# Altium PCB C8T6_MINI.PcbDoc
Units mm, origin at the board's own origin, x right, y up, seen from the top; angles counter-clockwise.
Board outline 100 x 50 mm, 2 copper layers (Top Layer, Bottom Layer); 43 components, 48 nets, 197 pads, 38 vias.
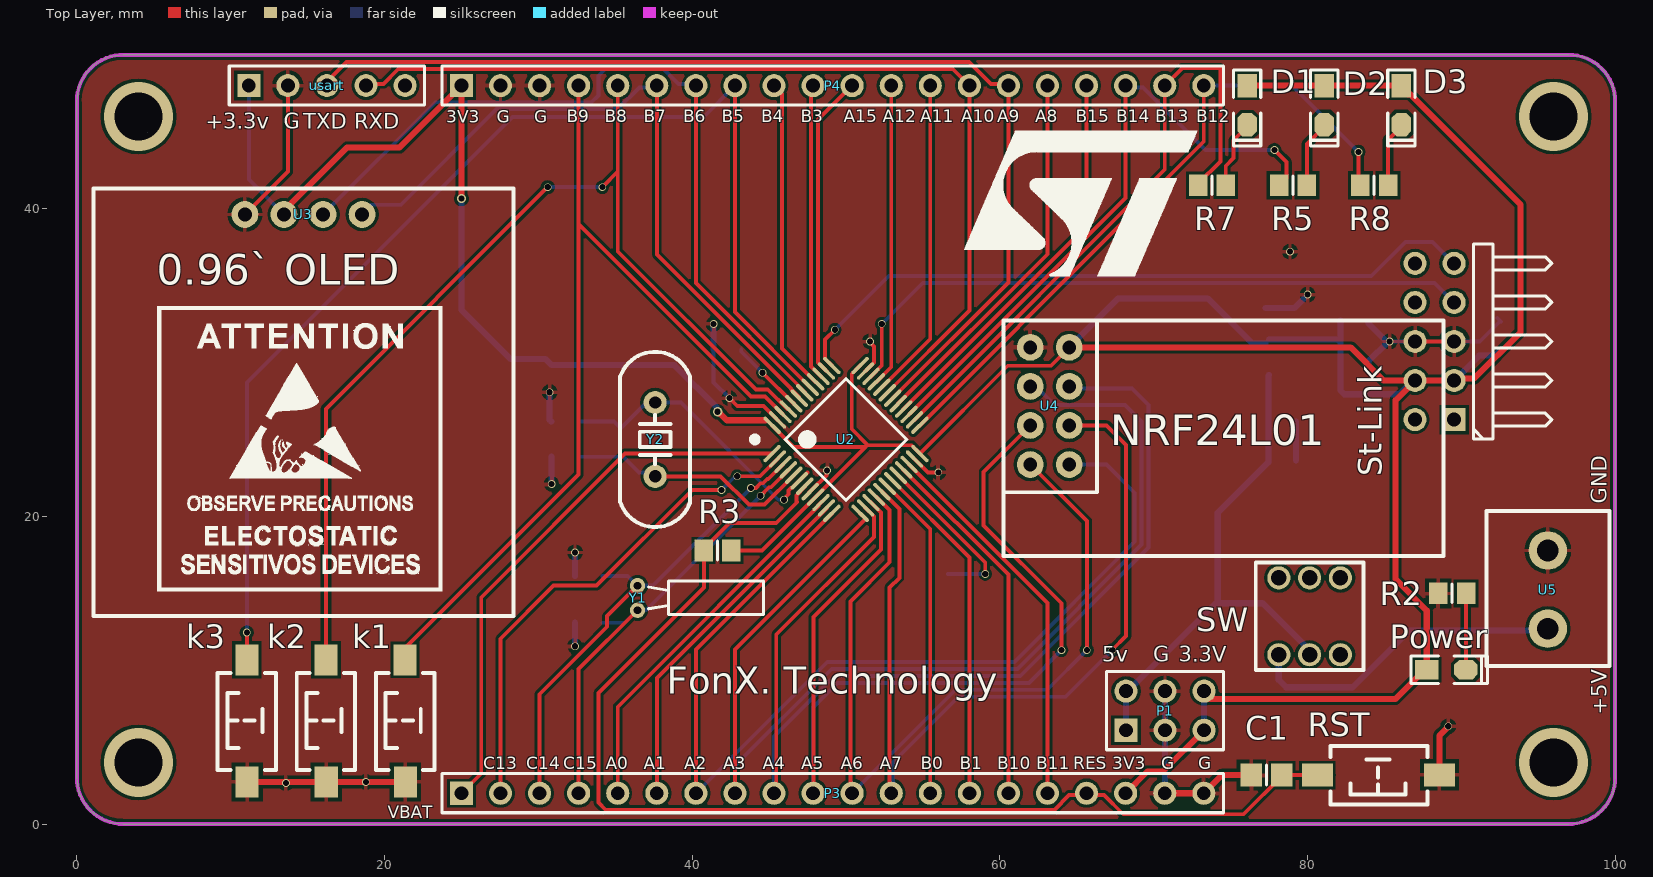
[diagram p0: Top Layer view]
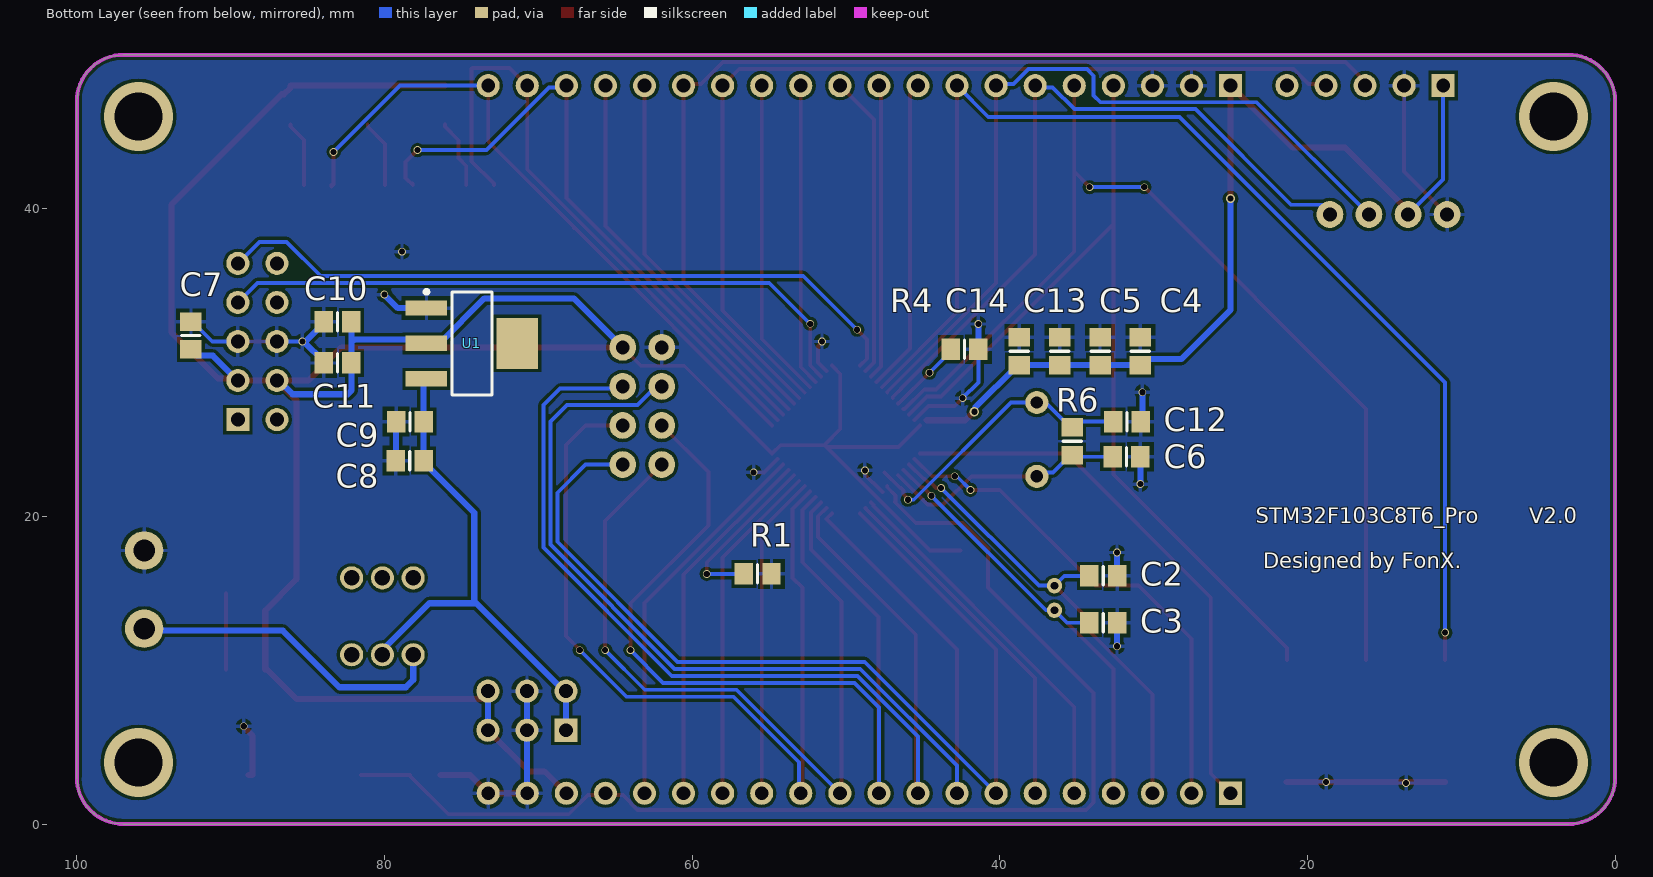
[diagram p1: Bottom Layer view, seen from below]

## Layer stack, top to bottom
Top Solder: solder mask 0.0102, Solder Resist, Dk 3.5
Top Layer: signal copper 0.0356
Dielectric 1: dielectric 0.32, FR-4, Dk 4.8
Bottom Layer: signal copper 0.0356
Bottom Solder: solder mask 0.0102, Solder Resist, Dk 3.5

## Board outline
3,0 cw(c3,3) 0,3 0,47 cw(c3,47) 3,50 97,50 cw(c97,47) 100,47 100,3 cw(c97,3) 97,0

## Design rules (kind name [scope] priority, off if disabled: settings)
Clearance Clearance_1 [All] p1: gap=0.2 ignorepadtopadclearanceinfootprint=FALSE
Clearance [All] p2: gap=0.254 ignorepadtopadclearanceinfootprint=FALSE except(0: Arc-Hole Track-Hole SMDPad-Hole THPad-Hole Via-Hole Fill-Hole Poly-Hole Region-Hole Text-Hole)
ComponentClearance [All] p1 off: gap=0.1 collisioncheckmode=3 verticalgap=0.1 showdistances=FALSE
Height [All] p1 off: minheight=0 maxheight=25.4 prefheight=12.7
HoleSize [All] p1: absolutevalues=TRUE maxlimit=3.2 minlimit=0.025 maxpercent=80.000 minpercent=20.000
HoleToHoleClearance [All] p1: gap=0.2 allowstackedmicrovias=TRUE
MinimumSolderMaskSliver [All] p1: minsoldermaskwidth=0.2
PolygonConnect [All] p1: connectstyle=Relief reliefconductorwidth=0.254 reliefentries=4 polygonreliefangle="90 Angle" airgapwidth=0.254
RoutingCorners RoutingCorners_1 [All] p1: cornerstyle=45-Degree minsetback=2.54 maxsetback=2.54
RoutingCorners [All] p2: cornerstyle=45-Degree minsetback=2.54 maxsetback=2.54
RoutingVias [All] p1: holewidth=0.711 width=1.27 viastyle="Through Hole" minholewidth=0.711 minwidth=1.27 maxholewidth=0.711 maxwidth=1.27
SilkToSilkClearance [All] p1: silktosilkclearance=0.1
SilkToSolderMaskClearance [IsPad] p1: minsilkscreentomaskgap=0.1 clearancetoexposedcopper=TRUE
SolderMaskExpansion [All] p1: expansion=0.102
Width input [InNet('INPUT')] p1: maxlimit=0.4 minlimit=0.4 preferedwidth=0.4
Width GND [InNet('GND')] p2: maxlimit=0.4 minlimit=0.254 preferedwidth=0.254
Width vcc5 [InNet('5V')] p3: maxlimit=0.4 minlimit=0.4 preferedwidth=0.4
Width vcc3.3 [InNet('VCC3V3')] p4: maxlimit=0.4 minlimit=0.254 preferedwidth=0.254
Width [All] p5: maxlimit=0.254 minlimit=0.254 preferedwidth=0.254
22 further rules are at their usual default settings.

## Components (designator, comment, footprint, x,y, rotation, side; value= is the part's Value field where it differs from the comment)
C1 "105,0805" 6-0805_M 77.343,3.175 r0 top value=104
C2 "12P,0805" 6-0805_N 33.274,16.129 r180 bottom value=104
C3 "12P,0805" 6-0805_N 33.274,13.081 r180 bottom value=104
C4 "105,0805" 6-0805_N 30.861,30.734 r270 bottom value=104
C5 "105,0805" 6-0805_N 33.486,30.734 r270 bottom value=104
C6 "22P,0805" 6-0805_N 31.761,23.876 r180 bottom value=104
C7 "104,0805" 6-0805_N 92.583,31.75 r90 bottom value=104
C8 "104,0805" 6-0805_N 78.359,23.622 r0 bottom value=104
C9 "106,0805" 6-0805_N 78.348,26.162 r0 bottom value=104
C10 "106,0805" 6-0805_N 83.058,32.639 r180 bottom value=104
C11 "104,0805" 6-0805_N 83.058,29.972 r180 bottom value=104
C12 "22P,0805" 6-0805_N 31.739,26.162 r180 bottom value=104
C13 "105,0805" 6-0805_N 36.11,30.734 r270 bottom value=104
C14 "105,0805" 6-0805_N 38.735,30.734 r270 bottom value=104
D1 "LED" "LED 0805G" 76.073,46.736 r270 top
D2 "LED" "LED 0805G" 81.09,46.736 r270 top
D3 "LED" "LED 0805G" 86.106,46.736 r270 top
k1 "SW-PB_V" "TSW SMD-3*6*2.5" 21.336,6.731 r90 top
k2 "SW-PB_V" "TSW SMD-3*6*2.5" 16.192,6.731 r90 top
k3 "SW-PB_V" "TSW SMD-3*6*2.5" 11.049,6.731 r90 top
P1 "Header 3X2A" HDR2X3_CEN 68.199,6.096 r0 top
P3 "Header 20" HDR1X20 25,2 r0 top
P4 "Header 20" HDR1X20 25,48 r0 top
Power "LED" "LED 0805G" 89.027,10.033 r0 top (schematic designator Power_LED)
R1 "10K,0805" 6-0805_N 55.742,16.256 r180 bottom
R2 "510R,0805" 6-0805_N 89.408,14.986 r180 top
R3 "10K,0805" 6-0805_N 41.645,17.78 r0 top
R4 "10K,0805" 6-0805_N 42.291,30.861 r180 bottom
R5 "510R,0805" 6-0805_N 79.063,41.529 r180 top
R6 "1M0805" 6-0805_N 35.306,24.881 r270 bottom
R7 "510R,0805" 6-0805_N 73.787,41.529 r180 top
R8 "510R,0805" 6-0805_N 84.339,41.529 r180 top
RST "SW-PB_V" "TSW SMD-3*6*2.5" 84.582,3.175 r180 top
St-Link "Header 5X2H" HDR2X5H 89.535,26.289 r90 top
SW "SW-DPDT" PCBComponent_1 78.137,11.002 r0 top
U1 "AMS1117" SOT223_M 74.324,31.242 r180 bottom
U2 "STM32F103C8T6" "TQFP48 7x7_L" 50,25 r315 top
U3 "OLED" OLED 1.082,13.524 r0 top
U4 "nrf24L01" NRF24L01 60.236,32.728 r270 top
U5 "POWER" power 95.631,12.7 r90 top
usart "Header 5" HDR1X5 11.176,48.006 r0 top
Y1 "32.768K" 圆柱晶振 36.449,14.694 r270 top
Y2 "8M" "XTAL-49S DIP" 37.592,25 r270 top

## Footprints (in the part's own frame and the unit in brackets; to place one, negate y for a bottom-side part, rotate by r counter-clockwise, add the part's x,y. Pads: shape width x height; smd on the part's side, far side on the other; paste and mask are expansions set on the pad)
6-0805_M [mm] "Chip Resistor, Body 2.0x1.2mm, IPC Low Density"
  rect 1.4x1.5 smd: 1(-1,0) 2(1,0)
  silkscreen extent 0,-0.65 0,0.65, body extent -1.07,-0.7 1.07,0.7, height 0.7
6-0805_N [mm] "Chip Resistor, Body 2.0x1.2mm, IPC Medium Density"
  rect 1.2x1.4 smd: 1(-0.9,0) 2(0.9,0)
  silkscreen extent 0,-0.6 0,0.6, body extent -1.07,-0.7 1.07,0.7, height 0.7
HDR1X5 [mm] "Connector; Header; 5 Position"
  rect 1.5x1.5 hole 0.9: 1(0,0)
  round 1.5 hole 0.9: 2(2.54,0) 3(5.08,0) 4(7.62,0) 5(10.16,0)
  silkscreen extent -1.27,-1.27 11.43,1.27
HDR1X20 [mm] "Connector; Header; 20 Position"
  rect 1.5x1.5 hole 0.9: 1(0,0)
  round 1.5 hole 0.9: 2(2.54,0) 3(5.08,0) 4(7.62,0) 5(10.16,0) 6(12.7,0) 7(15.24,0) 8(17.78,0) 9(20.32,0) 10(22.86,0) 11(25.4,0) 12(27.94,0) 13(30.48,0) 14(33.02,0) 15(35.56,0) 16(38.1,0) 17(40.64,0) 18(43.18,0) 19(45.72,0) 20(48.26,0)
  silkscreen extent -1.27,-1.27 49.53,1.27
HDR2X3_CEN [mm] "Connector; Header; 3x2 Position"
  rect 1.5x1.5 hole 0.9: 1(0,0)
  round 1.5 hole 0.9: 2(2.54,0) 3(5.08,0) 4(0,2.54) 5(2.54,2.54) 6(5.08,2.54)
  silkscreen extent -1.27,-1.27 6.35,3.81
HDR2X5H [mm] "Connector; Header; 5x2 Position; Right Angle"
  rect 1.5x1.5 hole 0.9: 1(0,0)
  round 1.5 hole 0.9: 2(0,2.54) 3(2.54,0) 4(2.54,2.54) 5(5.08,0) 6(5.08,2.54) 7(7.62,0) 8(7.62,2.54) 9(10.16,0) 10(10.16,2.54)
  silkscreen extent -1.27,-6.35 11.43,-1.27
"LED 0805G" [mil] "绿色0805LED"
  rect 60x50 smd: 1(-50,0)
  oct 60x50 smd: 2(50,0)
  silkscreen extent -90,-35 105,35, body extent -39,-25 39,25, height 32
NRF24L01 [mm]
  round 1.74 hole 0.9: 1(1.74,4.28) 2(1.74,1.74) 3(4.28,4.28) 4(4.28,1.74) 5(6.82,4.28) 6(6.82,1.74) 7(9.36,4.28) 8(9.36,1.74)
  silkscreen extent 0,0 15.3,28.6
OLED [mm]
  round 1.74 hole 0.9: 1(9.84,26.1) 2(12.38,26.1) 3(14.92,26.1) 4(17.46,26.1)
  silkscreen extent 0,0 27.3,27.8
PCBComponent_1 [mm]
  round 1.5 hole 1: 1(0,0) 2(2,0) 3(4.002,0) 4(4.002,5) 5(2,5) 6(0,5)
  silkscreen extent -1.5,-1 5.5,6
power [mm]
  round 2.5 hole 1.4: 1(0,0) 2(5.08,0)
  silkscreen extent -2.44,-4 7.66,4
SOT223_M [mm] "SOT223, 4-Leads, Body 6.5x3.5mm, Pitch 2.3mm, Lead Span 7mm, IPC Low Density"
  rect 2.7x1 smd: 1(-2.95,2.3) 2(-2.95,0) 3(-2.95,-2.3)
  rect 2.7x3.3 smd: 4(2.95,0)
  silkscreen extent -3.08,-3.35 1.3,3.47, body extent -1.85,-3.35 1.85,3.35, height 1.7
"TQFP48 7x7_L" [mm] "48脚，体宽：7x7mm, 脚距：0.5mm"
  oval 0.25x1.5 smd: 1(-2.75,-4.046) 2(-2.25,-4.046) 3(-1.75,-4.046) 4(-1.25,-4.046) 5(-0.75,-4.046) 6(-0.25,-4.046) 7(0.25,-4.046) 8(0.75,-4.046) 9(1.25,-4.046) 10(1.75,-4.046) 11(2.25,-4.046) 12(2.75,-4.046) 25(2.75,4.046) 26(2.25,4.046) 27(1.75,4.046) 28(1.25,4.046) 29(0.75,4.046) 30(0.25,4.046) 31(-0.25,4.046) 32(-0.75,4.046) 33(-1.25,4.046) 34(-1.75,4.046) 35(-2.25,4.046) 36(-2.75,4.046)
  oval 1.5x0.25 smd: 13(4.046,-2.75) 14(4.046,-2.25) 15(4.046,-1.75) 16(4.046,-1.25) 17(4.046,-0.75) 18(4.046,-0.25) 19(4.046,0.25) 20(4.046,0.75) 21(4.046,1.25) 22(4.046,1.75) 23(4.046,2.25) 24(4.046,2.75) 37(-4.046,2.75) 38(-4.046,2.25) 39(-4.046,1.75) 40(-4.046,1.25) 41(-4.046,0.75) 42(-4.046,0.25) 43(-4.046,-0.25) 44(-4.046,-0.75) 45(-4.046,-1.25) 46(-4.046,-1.75) 47(-4.046,-2.25) 48(-4.046,-2.75)
  silkscreen extent -4.32,-4.32 2.79,2.79, body extent -4.5,-4.5 4.5,4.5, height 1.05
"TSW SMD-3*6*2.5" [mm] "3*6*2.5mm"
  rect 2x1.5 smd: 1(-3.996,-0.02) 2(3.937,0)
  silkscreen extent -3.21,-1.9 3.09,1.9, body extent -4,-1.88 4,1.62, height 2.59
"XTAL-49S DIP" [mm]
  round 1.5 hole 0.8: 1(-2.4,0) 2(2.4,0)
  silkscreen extent -5.7,-2.28 5.7,2.28, body extent -5.68,-2.35 5.67,2.3, height 3.5
圆柱晶振 [mm] "脚距：1.6mm"
  round 1 hole 0.5: 1(0.8,0) 2(-0.8,0)
  silkscreen extent -1.1,0.7 1.07,8.2, body extent -1,-0.16 1,8, height 2.05

## Part data
C1: library part Cap, "Capacitor", LatestRevisionDate=17-Jul-2002, LatestRevisionNote="Re-released for DXP Platform.", Published=8-Jun-2000, Publisher="Altium Limited"
C2 C3 C4 C5 C6 C7 C8 C9 C10 C11 C12 C13 C14: library part Cap_2, "Capacitor", LatestRevisionDate=17-Jul-2002, LatestRevisionNote="Re-released for DXP Platform.", Published=8-Jun-2000, Publisher="Altium Limited"
k1 k2 k3 RST: "SWITCH"
P1: "Header, 3-Pin, Dual row", LatestRevisionDate=17-Jul-2002, LatestRevisionNote="Re-released for DXP Platform.", Publisher="Altium Limited"
P3 P4: "Header, 20-Pin", LatestRevisionDate=17-Jul-2002, LatestRevisionNote="Re-released for DXP Platform.", Publisher="Altium Limited"
R1 R2 R3 R4 R5 R6 R7 R8: library part Res2, "Resistor", LatestRevisionDate=17-Jul-2002, LatestRevisionNote="Re-released for DXP Platform.", Published=8-Jun-2000, Publisher="Altium Limited"
St-Link: "Header, 5-Pin, Dual row, Right Angle", LatestRevisionDate=17-Jul-2002, LatestRevisionNote="Re-released for DXP Platform.", Publisher="Altium Limited"
SW: "Double-Pole, Double-Throw Switch", LatestRevisionDate=17-Jul-2002, LatestRevisionNote="Re-released for DXP Platform.", PackageDescription="Switch; 6 Leads", PackageReference=DPDT-6, Published=24-Mar-1999, Publisher="Altium Limited"
U1: library part Component_1
U3: library part oled
usart: "Header, 5-Pin", LatestRevisionDate=17-Jul-2002, LatestRevisionNote="Re-released for DXP Platform.", Publisher="Altium Limited"
Y1: library part XTAL_1, "Crystal Oscillator", LatestRevisionDate=17-Jul-2002, LatestRevisionNote="Re-released for DXP Platform.", Published=8-Jun-2000, Publisher="Altium Limited"
Y2: library part XTAL, "Crystal Oscillator", LatestRevisionDate=17-Jul-2002, LatestRevisionNote="Re-released for DXP Platform.", Published=8-Jun-2000, Publisher="Altium Limited"

## Via types
v1: diameter 0.5, hole 0.4, Top Layer to Bottom Layer, tented both sides, 32 vias
v2: diameter 4.5, hole 3.1, Top Layer to Bottom Layer, 4 vias
v3: diameter 0.6, hole 0.4, Top Layer to Bottom Layer, tented both sides, 2 vias

## Nets (pads, with @x,y where several pads share a name; then routed paths per layer and width w, separated by ;. In a path a pad name is that pad's centre, name@x,y a point inside that pad or via, vN(x,y) a via of type N, cw(c..) or ccw(c..) an arc to the next point about the centre after c; other vN are vias at no path point)
5V: C8.1 C9.1 P1.1 P1.4 SW.2 U1.3 | length 34.6
  Bottom Layer w0.4: P1.1@68.199,5.969 68.199,7.239 68.199,8.509 74.168,14.478 74.168,20.231 77.459,23.522 C8.1 77.459,29.156 U1.3@77.499,29.196 ; 74.168,14.351 77.086,14.351 80.137,11.3 SW.2
BOOT0: R4.1 U2.44 | length 5
  Top Layer w0.254: v1(44.577,29.337) 46.583,27.331 U2.44
  Bottom Layer w0.254: R4.1 43.191,30.723 v1(44.577,29.337)
BOOT1: R1.1 U2.20 | length 11.2
  Top Layer w0.254: U2.20 59.055,17.006 v1(59.055,16.256)
  Bottom Layer w0.254: R1.1 v1(59.055,16.256)
GND: C1.1 C2.2 C3.2 C4.1 C5.1 C6.2 C7.2 C8.2 C9.2 C10.1 C11.1 C12.2 C13.1 C14.1 k1.1 k2.1 k3.1 P1.2 P1.5 P3.19 P3.20 P4.2 P4.3 R1.2 R2.2 R4.2 RST.1 St-Link.5 St-Link.6 U1.1 U2.8 U2.23 U2.35 U2.47 U3.1 U4.2 U5.2 usart.2 | length 75.7
  Top Layer w0.254: U3.1 13.716,42.418 usart.2 ; v1(42.418,27.686) 42.929,27.175 44.643,27.175 U2.47 ; U2.8@47.637,21.573 47.77,21.706 47.77,21.709 48.721,22.66 48.721,22.94 v1(48.768,22.987) ; U2.35 51.27,29.455 51.81,29.995 51.81,31.054 51.562,31.302 v1(51.562,31.369) ; U2.23 55.322,22.86 v1(56.007,22.86) ; v1(85.344,31.369) v1@85.391,31.416 ; St-Link.6 St-Link.5
  Top Layer w0.4: k3.1 13.494,2.735 13.562,2.667 v1(13.589,2.667) 13.616,2.667 13.684,2.735 k2.1 v1(18.784,2.735) k1.1 ; P3.19 P3.20 74.435,3.175 C1.1 ; RST.1@88.828,3.195 RST.1 88.578,5.747 89.154,6.323 v1(89.154,6.35) v1@89.173,6.369
  Bottom Layer w0.254: R4.2 41.391,28.713 v1(42.418,27.686) ; v1(85.344,31.369) St-Link.6 ; St-Link.5 91.202,31.369 92.483,32.65 C7.2 C7.2@92.34,32.893
  Bottom Layer w0.4: v1(30.734,28.067) 30.734,26.267 C12.2 ; v1(30.861,22.098) C6.2 ; C3.2 32.385,13.07 v1(32.385,11.557) ; C2.2 32.385,16.14 v1(32.385,17.653) ; R4.2 41.397,30.867 v1(41.397,32.507) ; P3.19 70.739,2.019 P1.2 P1.5 ; U1.1 79.135,33.542 v1(80.01,34.417) ; C9.2 79.248,23.633 C8.2 ; C11.1 83.958,30.072 85.236,31.35 85.325,31.35 v1(85.344,31.369) ; C10.1 83.958,32.539 v1@85.109,31.388
  other v1: 78.867,37.211
INPUT: SW.1 U5.1 | length 20.9
  Bottom Layer w0.4: SW.1 78.137,9.366 78.613,8.89 82.931,8.89 86.614,12.573 95.504,12.573 U5.1
NetD1_2: D1.2 R7.1 | length 4.5
  Top Layer w0.254: R7.1 74.687,42.787 75.187,43.287 75.187,44.453 76.073,45.339 D1.2
NetD2_2: D2.2 R5.1 | length 4.4
  Top Layer w0.254: R5.1 79.963,44.212 81.09,45.339 D2.2
NetD3_2: D3.2 R8.1 | length 4.3
  Top Layer w0.254: R8.1 85.239,44.472 86.106,45.339 D3.2
NetPower_2: Power.2 R2.1 | length 5
  Top Layer w0.254: Power.2 90.297,14.975 R2.1
OSCIN: C6.1 R6.2 U2.5 Y2.2 | length 16.1
  Top Layer w0.254: Y2.2 41.843,22.6 43.684,20.759 44.698,20.759 U2.5
  Bottom Layer w0.254: C6.1 35.201,23.876 R6.2 35.406,23.981 36.549,22.838 37.354,22.838 Y2.2
OSCOUT: C12.1 R6.1 U2.6 Y2.1 | length 19.2
  Top Layer w0.254: v1(45.974,21.082) 45.974,21.149 46.263,21.438 46.263,21.682 46.412,21.831 46.474,21.831 47.503,22.859
  Bottom Layer w0.254: C12.1 34.925,26.162 R6.1 35.406,25.781 36.93,27.305 37.465,27.305 Y2.1@37.592,27.432 ; Y2.1 39.275,27.4 45.593,21.082 v1(45.974,21.082)
PA0: P3.5 U2.10 | length 24.4
  Top Layer w0.254: P3.5 35.16,7.617 48.224,20.681 48.224,20.749 U2.10
PA1: P3.6 U2.11 | length 23.1
  Top Layer w0.254: P3.6 37.7,9.485 48.73,20.515 U2.11
PA2: P3.7 U2.12 U4.7 | length 65.3
  Top Layer w0.254: P3.7 40.24,11.351 U2.12
  Bottom Layer w0.254: P3.7 48.781,10.541 60.953,10.541 68.761,18.349 68.761,21.536 66.929,23.368 U4.7
PA3: P3.8 U2.13 U4.4 | length 72.3
  Top Layer w0.254: P3.8@42.799,2.019 P3.8 42.78,11.354 51.267,19.841 51.267,19.844 U2.13
  Bottom Layer w0.254: P3.8 42.78,3.791 49.076,10.087 61.141,10.087 69.215,18.161 69.215,26.162 68.135,27.241 68.145,27.251 63.554,27.251 62.357,28.448 U4.4
PA4: P3.9 U2.14 U4.3 | length 69.5
  Top Layer w0.254: P3.9 45.466,2.146 45.466,12.319 51.81,18.663 51.81,20.005 51.27,20.545 U2.14
  Bottom Layer w0.254: P3.9 45.32,5.689 49.264,9.633 61.329,9.633 69.669,17.973 69.669,27.232 68.58,28.321 64.643,28.321 U4.3
PA5: P3.10 U2.15 U4.6 | length 62.2
  Top Layer w0.254: P3.10 47.879,2.019 47.879,13.462 52.264,17.847 52.264,20.258 51.624,20.899 U2.15 ; U4.6 58.95,22.882 58.95,19.409 64.008,14.351 v1(64.008,11.303)
  Bottom Layer w0.254: P3.10 47.86,7.587 49.452,9.179 61.884,9.179 v1(64.008,11.303)
PA6: P3.11 U2.16 U4.8 | length 53.4
  Top Layer w0.254: P3.11 50.292,2.108 50.292,14.478 52.832,17.018 52.832,20.4 U2.16 ; U4.8 65.659,19.685 v1(65.659,11.303)
  Bottom Layer w0.254: P3.11 57.125,8.725 63.081,8.725 v1(65.659,11.303)
PA7: P3.12 U2.17 U4.5 | length 57.6
  Top Layer w0.254: U2.17 53.467,20.472 53.467,16.002 52.832,15.367 52.832,2.108 P3.12 ; U4.5 66.929,25.908 68.199,24.638 68.199,12.214 67.31,11.325 v1(67.31,11.303)
  Bottom Layer w0.254: P3.12 53.054,2.114 53.054,4.012 57.313,8.271 64.278,8.271 v1(67.31,11.303)
PA8: P4.16 U2.29 | length 24.7
  Top Layer w0.254: U2.29 63.1,37.039 P4.16
PA11: P4.13 U2.32 | length 20.9
  Top Layer w0.254: U2.32 55.48,31.541 P4.13
PA12: P4.12 U2.33 | length 19.7
  Top Layer w0.254: U2.33 51.977,28.748 52.94,29.711 P4.12
PA15: P4.11 U2.38 | length 19.7
  Top Layer w0.254: U2.38 48.73,29.455 48.19,29.995 48.19,45.79 P4.11
PB0: P3.13 U2.18 | length 21.1
  Top Layer w0.254: U2.18 55.48,19.166 P3.13
PB1: P3.14 U2.19 | length 22.4
  Top Layer w0.254: U2.19 58.02,17.334 P3.14
PB3: P4.10 U2.39 | length 19.2
  Top Layer w0.254: P4.10 47.736,47.876 47.736,29.742 48.376,29.101 U2.39
PB4: P4.9 U2.40 | length 20.4
  Top Layer w0.254: P4.9 45.847,47.473 45.847,30.921 U2.40
PB5: k3.2 P4.8 U2.41 | length 79.4
  Top Layer w0.254: k3.2 v1(11.049,12.446) ; P4.8 42.78,33.281 U2.41
  Bottom Layer w0.254: v1(11.049,12.446) 11.049,28.702 28.321,45.974 40.754,45.974 P4.8
PB8: k2.2 P4.5 U2.45 | length 67.8
  Top Layer w0.254: k2.2 16.192,26.987 v1(30.607,41.402) ; v1(34.163,41.402) 34.163,41.421 35.16,42.418 ; P4.5 35.16,42.418 ; U2.45 46.19,26.977 44.915,28.252 44.138,28.252 35.16,37.23 35.16,42.418
  Bottom Layer w0.254: v1(30.607,41.402) v1(34.163,41.402)
PB9: k1.2 P4.4 U2.46 | length 60.4
  Top Layer w0.254: k1.2 21.336,11.43 32.62,22.714 32.62,39.008 ; P4.4 32.62,39.008 ; U2.46 44.727,27.798 43.83,27.798 32.62,39.008
PB10: P3.15 U2.21 | length 23.8
  Top Layer w0.254: U2.21 60.56,16.208 P3.15
PB11: P3.16 U2.22 | length 25.1
  Top Layer w0.254: U2.22 63.1,14.375 P3.16
PB12: P4.20 R8.2 U2.25 | length 44
  Top Layer w0.254: U2.25 67.658,38.768 ; 67.691,38.735 67.658,38.768 ; P4.20 73.26,44.371 67.658,38.768 ; v1(83.312,43.688) 83.312,41.556 83.439,41.429 R8.2
  Bottom Layer w0.254: P4.20 79,48 v1(83.312,43.688)
PB13: P4.19 R7.2 U2.26 | length 40.8
  Top Layer w0.254: U2.26 70.72,42.538 P4.19 71.869,49.149 74.295,49.149 74.337,49.107 74.337,43.079 72.887,41.629 R7.2
PB14: P4.18 R5.2 U2.27 | length 41.7
  Top Layer w0.254: U2.27 68.18,40.705 P4.18 P4.18@68.294,48.114 ; v1(77.851,43.815) 78.636,43.03 78.636,42.002 R5.2 R5.2@78.163,41.629
  Bottom Layer w0.254: P4.18 68.294,47.886 69.311,47.886 73.382,43.815 v1(77.851,43.815)
PB15: P4.17 U2.28 | length 26
  Top Layer w0.254: U2.28 65.64,38.872 P4.17
PC13: P3.2 U2.2 | length 32.9
  Top Layer w0.254: P3.2 27.54,12.046 30.988,15.494 33.782,15.494 40.005,21.717 v1(41.91,21.717) ; v1(42.926,22.606) 44.421,22.606 45.545,23.73 U2.2
  Bottom Layer w0.254: v1(41.91,21.717) 42.799,22.606 v1(42.926,22.606)
PC14: C2.1 P3.3 U2.3 Y1.2 | length 31.4
  Top Layer w0.254: P3.3 30.08,8.436 34.465,12.821 34.465,13.51 Y1.2 ; v1(43.815,21.844) 44.142,21.844 44.45,22.152 44.609,22.152 44.878,22.421 44.946,22.421 U2.3
  Bottom Layer w0.254: C2.1 35.814,16.129 Y1.2 37.465,15.494 v1(43.815,21.844)
PC15: C3.1 P3.4 U2.4 Y1.1 | length 29.8
  Top Layer w0.254: P3.4 32.62,10.065 Y1.1 ; v1(44.45,21.336) 45.005,21.891 45.123,21.891 U2.4
  Bottom Layer w0.254: C3.1 35.636,13.081 Y1.1 37.008,13.894 v1(44.45,21.336) v1@44.323,21.336
RESET: C1.2 P3.17 R3.1 RST.2 U2.7 | length 78.3
  Top Layer w0.254: U2.7 47.316,21.894 46.775,21.354 46.775,20.98 46.831,20.923 45.466,19.558 42.423,19.558 40.745,17.88 R3.1 40.767,17.758 40.767,15.367 33.909,8.509 33.909,1.397 34.383,0.923 63.546,0.923 64.509,1.886 65.526,1.886 P3.17 65.754,1.886 66.771,1.886 68.022,0.635 75.853,0.635 78.343,3.125 C1.2 RST.2 RST.2@81.534,3.175
  Bottom Layer w0.254: P3.17@65.357,2.283 P3.17
RXD/PA10: P4.14 U2.31 usart.4 | length 62.3
  Top Layer w0.254: usart.4 18.91,48.12 19.927,48.12 20.89,49.083 56.937,49.083 P4.14 58.02,33.374 U2.31
SCK/PB6: P4.7 U2.42 U3.3 | length 52.2
  Top Layer w0.254: P4.7 40.24,35.179 47.316,28.103 U2.42
  Bottom Layer w0.254: U3.3 23.301,46.923 33.461,46.923 33.909,47.371 33.909,48.641 34.345,49.077 38.146,49.077 39.109,48.114 40.126,48.114 P4.7
SDA/PB7: P4.6 U2.43 U3.4 | length 46.1
  Top Layer w0.254: P4.6 37.7,37.03 46.422,28.308 46.422,28.292 46.862,27.853 46.862,27.85 46.962,27.749 U2.43
  Bottom Layer w0.254: U3.4@18.923,40.259 21.082,40.259 27.292,46.469 35.152,46.469 36.569,47.886 37.586,47.886 P4.6
SWDCLK: St-Link.9 U2.37 | length 46
  Top Layer w0.254: 48.644,30.988 48.644,31.499 v1(49.276,32.131) ; 48.644,30.987 48.644,30.245 U2.37
  Bottom Layer w0.254: v1(49.276,32.131) 52.778,35.633 84.147,35.633 86.36,37.846 88.138,37.846 St-Link.9
SWDIO: St-Link.7 U2.34 | length 42.5
  Top Layer w0.254: U2.34 52.324,29.799 v1(52.324,32.512)
  Bottom Layer w0.254: v1(52.324,32.512) 54.991,35.179 88.265,35.179 St-Link.7
TXD/PA9: P4.15 U2.30 usart.3 | length 69.2
  Top Layer w0.254: usart.3 16.256,48.26 17.533,49.537 58.006,49.537 59.429,48.114 60.446,48.114 P4.15 60.56,35.206 U2.30
VBAT: P3.1 U2.1 | length 36
  Top Layer w0.254: P3.1 26.289,3.289 26.289,14.732 35.641,24.084 U2.1
VCC3V3: C4.2 C5.2 C7.1 C10.2 C11.2 C13.2 C14.2 D1.1 D2.1 D3.1 P1.3 P1.6 P3.18 P4.1 Power.1 R3.2 St-Link.3 St-Link.4 U1.2 U2.9 U2.24 U2.36 U2.48 U3.2 U4.1 usart.1 | length 240.7
  Top Layer w0.254: R3.2 44.548,17.78 U2.9 51.279,24.511 46.6,24.511 U2.48 ; U2.36 50.916,29.803 50.376,29.262 50.376,25.669 51.406,24.639 ; 51.421,24.624 54.262,24.624 54.803,24.084 U2.24 60.513,29.791 63.319,29.791 U4.1
  Top Layer w0.4: U3.2@13.843,40.259 17.567,43.983 20.983,43.983 P4.1 v3(25,40.659) ; v3(41.656,26.797) 41.71,26.797 42.255,26.252 U2.48@44.753,26.252 ; U4.1 82.804,30.988 84.963,28.829 St-Link.4 ; P3.18 69.593,3.413 70.596,3.413 P1.3 ; P1.6@73.279,8.128 85.725,8.128 87.63,10.033 Power.1 87.757,13.871 85.725,15.903 85.725,27.559 St-Link.4 ; D1.1 D2.1 D3.1 86.106,47.879 86.541,47.444 86.668,47.444 93.853,40.259 93.853,31.984 90.825,28.956 St-Link.3@89.662,28.956 ; St-Link.3 St-Link.4
  Bottom Layer w0.254: usart.1 11.176,41.91 U3.2
  Bottom Layer w0.4: v3(25,40.659) 25,33.42 28.186,30.234 30.461,30.234 C4.2 C5.2 C13.2 C14.2 38.835,29.834 41.618,27.051 41.618,26.835 v3(41.656,26.797) ; U4.1@64.516,31.115 U4.1 67.691,34.163 73.503,34.163 76.424,31.242 U1.2 ; P1.3 P1.6 ; U1.2@77.499,31.496 81.968,31.496 82.158,31.306 ; C10.2@82.158,32.739 C10.2 82.158,31.306 ; St-Link.4 86.864,28.829 85.975,27.94 82.392,27.94 82.158,28.174 C11.2 82.158,31.306 ; St-Link.3 91.156,30.45 92.183,30.45 C7.1
pads on no net: St-Link.1 St-Link.2 St-Link.8 St-Link.10 SW.3 SW.4 SW.5 SW.6 U1.4 usart.5
copper on no net:
  other v2: 4,4 96,4 4,46 96,46

## Polygon pours and split planes (outlines as drawn)
GND on Top Layer "Top Layer-GND" (solid, pour order 11): -0.127,49.974 0,50.102 99.822,50.102 99.822,0.699 99.314,0.191 0,0.191 -0.127,0.318
no net on Top Layer "Top Layer-No Net" (solid, pour order 2): -2.921,49.53
GND on Bottom Layer "Bottom Layer-GND" (solid, pour order 13): -0.089,-0.127 -0.089,50.038 97.712,49.662 99.784,48.641 99.86,0.635 99.225,0 0.038,0

## Keep-outs
Keep-Out Layer:
  region: 4.572,44.958
  lines w0.254: 96.95,49.999 ccw(c96.95,50) 96.951,50 ; 96.951,50 cw(c97,47) 99.999,46.936 99.999,3.05 ; 96.95,49.999 3.064,49.999 ccw(c3,47) 0,46.951 cw(c0,46.95) 0.001,46.95 0.001,3.064 ccw(c3,3) 3.049,0 cw(c3.05,0) 3.05,0.001 96.936,0.001 ccw(c97,3) 100,3.049 ; 99.999,3.05 ccw(c100,3.05) 100,3.049

## Silkscreen, mask and mechanical layers (free items; w line width, h text height)
Top Overlay:
  drawing of 8105 lines, arcs and shapes, not listed
  text "B9" at 31.852,45.618 h0.81
  text "B8" at 34.315,45.618 h0.81
  text "B7" at 36.855,45.618 h0.81
  text "B6" at 39.421,45.618 h0.81
  text "B5" at 41.91,45.618 h0.81
  text "B4" at 44.501,45.618 h0.81
  text "B3" at 47.066,45.618 h0.81
  text "A15" at 49.86,45.618 h0.81
  text "A12" at 52.375,45.618 h0.81
  text "A11" at 54.813,45.618 h0.81
  text "A10" at 57.506,45.618 h0.81
  text "A9" at 59.842,45.618 h0.81
  text "A8" at 62.306,45.618 h0.81
  text "B15" at 64.948,45.618 h0.81
  text "B14" at 67.564,45.618 h0.81
  text "B13" at 70.104,45.618 h0.81
  text "B12" at 72.771,45.618 h0.81
  text "3V3" at 24.003,45.593 h0.81
  text "G" at 27.305,45.593 h0.81
  text "G" at 29.718,45.593 h0.81
  text "+3.3v" at 8.382,45.212 h1
  text "G" at 13.462,45.212 h1
  text "G" at 13.462,45.212 h1
  text "TXD" at 14.732,45.212 h1
  text "RXD" at 18.034,45.212 h1
  text "GND" at 99.441,20.828 h1 r90
  text "5v" at 66.675,10.541 h1
  text "G" at 69.977,10.541 h1
  text "3.3V" at 71.628,10.541 h1
  text "FonX. Technology" at 38.354,7.874 h3
  text "+5V" at 99.441,7.112 h1 r90
  text "C13" at 26.416,3.556 h0.81
  text "C14" at 29.21,3.556 h0.81
  text "C15" at 31.623,3.556 h0.81
  text "A0" at 34.392,3.556 h0.81
  text "A1" at 36.855,3.556 h0.81
  text "A2" at 39.497,3.556 h0.81
  text "A3" at 42.012,3.556 h0.81
  text "A4" at 44.577,3.556 h0.81
  text "A5" at 47.092,3.556 h0.81
  text "A6" at 49.657,3.556 h0.81
  text "A7" at 52.197,3.556 h0.81
  text "B0" at 54.864,3.556 h0.81
  text "B1" at 57.404,3.556 h0.81
  text "B10" at 59.817,3.556 h0.81
  text "B11" at 62.357,3.556 h0.81
  text "RES" at 64.77,3.556 h0.81
  text "3V3" at 67.31,3.556 h0.81
  text "G" at 70.485,3.556 h0.81
  text "G" at 72.898,3.556 h0.81
  text "VBAT" at 20.193,0.381 h0.81
Bottom Overlay:
  text "V2.0" at 5.588,19.558 h1
  text "STM32F103C8T6_Pro" at 23.368,19.558 h1
  text "Designed by FonX." at 22.86,16.637 h1
Mechanical 1:
  lines w0.254: 2.994,0 97,0 ccw(c97,3) 100,3 100,47 ccw(c97,47) 97,50 2.925,50 ccw(c2.925,47.075) 0,47.075 0,3 ccw(c3,3) 3,0

## Text inside footprints (layer, text, board x,y; h text height)
U3: Top Overlay "0.96` OLED" at 5.207,35.052 h2
U4: Top Overlay "NRF24L01" at 67.183,24.638 h2